# EAGLE board eeZee Crystal (EAGLE 6.1)
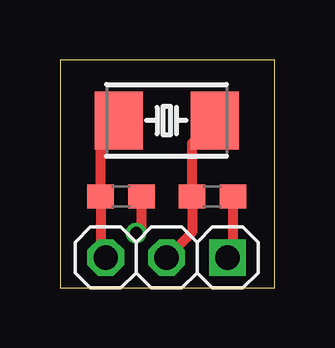
[diagram p0: board, top side]
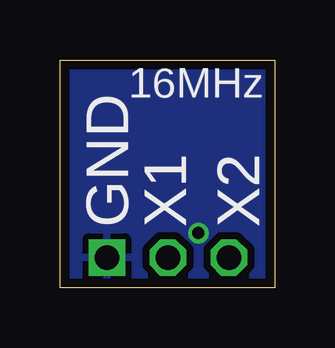
[diagram p1: board, bottom side, seen from below]

Size 8.94 x 9.52 mm. Coordinates in mm from the lower left corner, seen from the top.
Outline: 0,0 8.94,0 8.94,9.52 0,9.52 0,0
Copper layers (1*16): Top 0.0356mm / dielectric 1.5011mm / Bottom 0.0356mm
Design rules: minimum track width 6mil, minimum drill 13mil, track to track 6mil, track to pad 6mil, pad to pad 6mil, via to via 6mil, smd to smd 6mil, copper to edge 15mil, drill to drill 6mil, minimum pad ring 7mil, minimum via ring 7mil, stop-mask expansion 4mil, vias tented up to drill 0mil, thermal gap 10mil

## Footprints (pad centres in the part's own frame; a part is rotated, then mirrored left to right if it is on the bottom)
C0603 = smd 1.1 x 1: 1 -0.85,0; 2 0.85,0
1X03-S = drill 1.016 square: 1 -2.54,0 | drill 1.016 octagon: 2 0,0; 3 2.54,0
NDK_2PAD_5X3 = smd 2 x 2.4: P$1 -2,0; P$2 2,0

## Placement (x,y rotation side)
C1  8pF  [C0603]  6.35,3.81 0 top
C2  8pF  [C0603]  2.54,3.81 0 top
JP1  XTAL  [1X03-S]  4.45,1.27 180 top
Q1  16MHz  [NDK_2PAD_5X3]  4.45,6.99 0 top

## Library data of the parts
C1 C2 = rcl; BOM: INCLUDE; PARTNO: C1608C0G1H080D
JP1 = pinhead-2; BOM: EXCLUDE
Q1 = mes_crystal; PARTNO: NX5032GA-16.000000MHZ-LN-CD-1

## Nets
GND: C1.2 C2.2 JP1.1
N$2: C1.1 JP1.2 Q1.P$2
N$3: C2.1 JP1.3 Q1.P$1

## Tracks (layer width: path | path; a pad name or v marks a point on that pad's centre or on a via)
GND  (via drill 0.5)
  Top 0.406: C1.2 7.2,1.49 JP1.1 | C2.2 3.39,2.5 v3.17,2.29
  pour Bottom (isolate 0.305): 0,9.53 8.89,9.53 8.89,0 0,0
N$2
  Top 0.406: Q1.P$2 5.5,6.04 C1.1 5.5,2.33 JP1.2
N$3
  Top 0.406: Q1.P$1 1.69,6.23 C2.1 1.69,1.49 JP1.3

## Text on the board
bPlace: X2 | X1 | GND
_bsilk: 16MHz | X2 | X1 | GND